# Altium PCB BMS Slave Device R1.5.PcbDoc
Units mil, origin at the board's own origin, x right, y up, seen from the top; angles counter-clockwise.
Board outline 2880 x 2235 mil, 2 copper layers (Top Layer, Bottom Layer); 91 components, 81 nets, 283 pads, 63 vias.
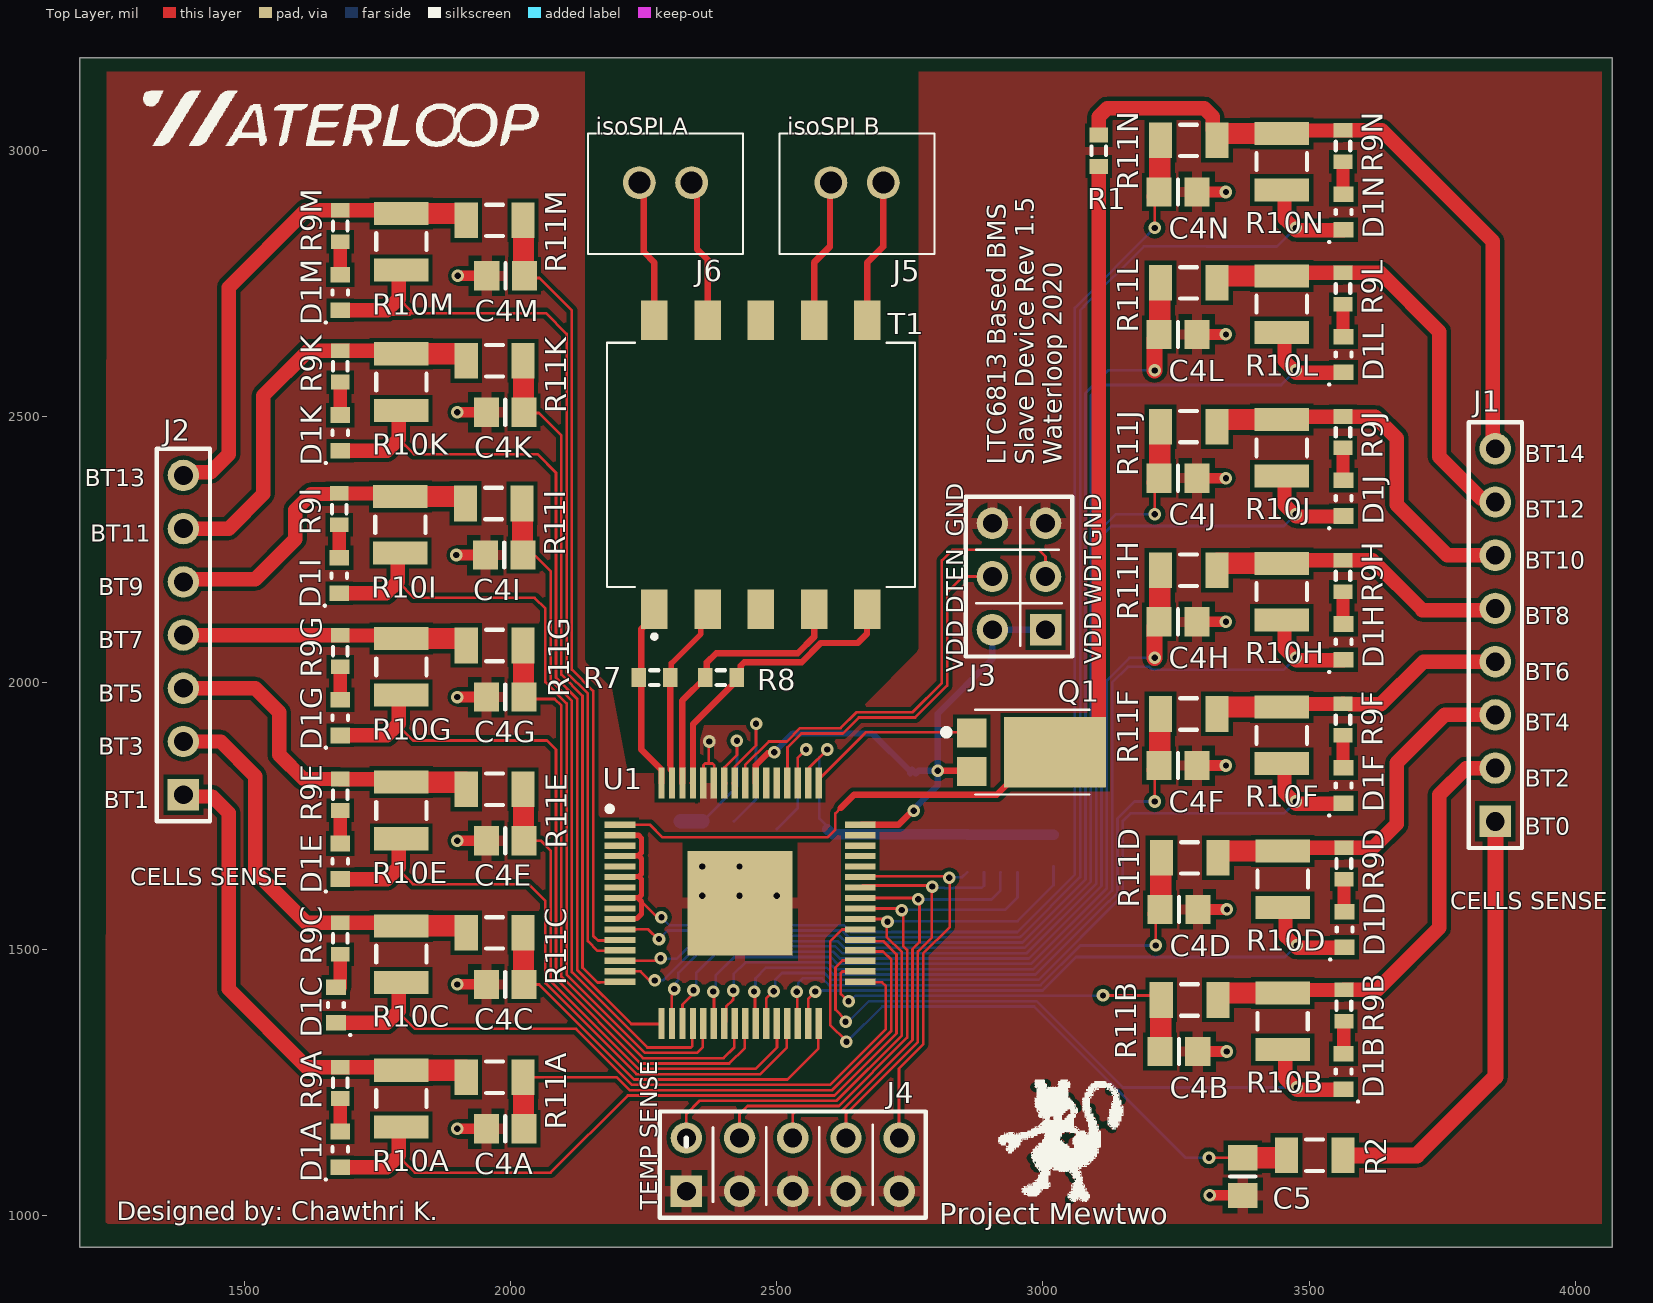
[diagram p0: Top Layer view]
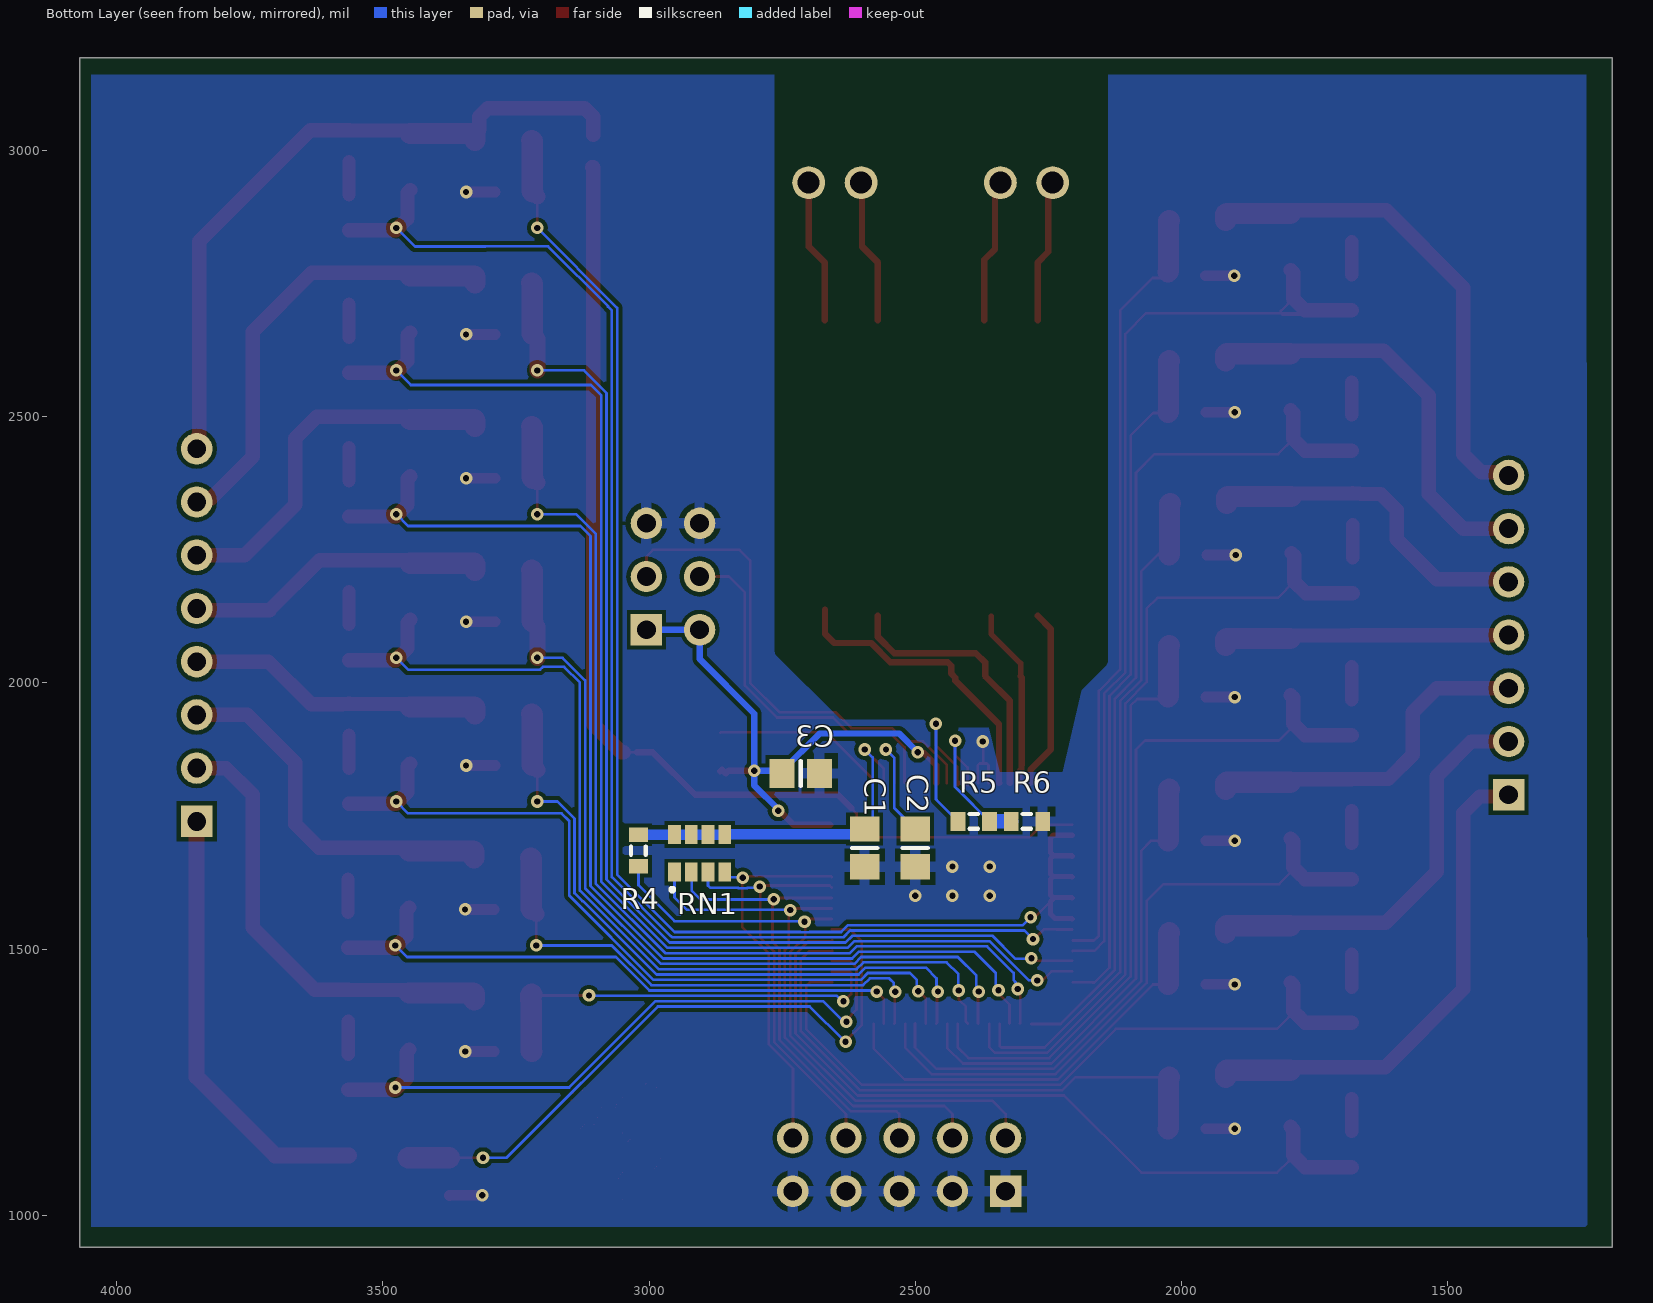
[diagram p1: Bottom Layer view, seen from below]

## Layer stack, top to bottom
Top Solder: solder mask 0.4, Solder Resist, Dk 3.5
Top Layer: signal copper 1.4
Dielectric 1: dielectric 12.6, FR-4, Dk 4.8
Bottom Layer: signal copper 1.4
Bottom Solder: solder mask 0.4, Solder Resist, Dk 3.5

## Board outline
1190,940 4070,940 4070,3175 1190,3175

## Design rules (kind name [scope] priority, off if disabled: settings)
BoardOutlineClearance [All] p1: gap=7.87 ignorepadtopadclearanceinfootprint=FALSE except(15.75: Arc-SplitBarrior Arc-SplitContinuation Track-SplitBarrior Track-SplitContinuation SMDPad-SplitBarrior SMDPad-SplitContinuation THPad-SplitBarrior THPad-SplitContinuation Via-SplitBarrior Via-SplitContinuation Fill-SplitBarrior Fill-SplitContinuation Poly-SplitBarrior Poly-SplitContinuation Region-SplitBarrior Region-SplitContinuation Text-SplitBarrior Text-SplitContinuation)
Clearance [All] p1: gap=7.87 ignorepadtopadclearanceinfootprint=FALSE except(3.5: Arc-Arc Arc-Track Arc-SMDPad Track-Track Track-SMDPad SMDPad-SMDPad; 5: Arc-Via Track-Via SMDPad-Via THPad-Via Via-Via; 10: Arc-Text Track-Text SMDPad-Text THPad-Text Via-Text Fill-Text Poly-Text Region-Text Text-Text)
HoleSize [All] p1: absolutevalues=TRUE maxlimit=248.03 minlimit=7.87 maxpercent=80.000 minpercent=20.000
MinimumAnnularRing [All] p1: minimumring=3
MinimumSolderMaskSliver [All] p1: minsoldermaskwidth=3.94
PlaneConnect [All] p1: planeconnectstyle=Relief reliefexpansion=20 reliefentries=4 reliefconductorwidth=5.1 reliefairgap=10
PolygonConnect PolygonConnect_1 [All] p1: thpad.connectstyle=Relief thpad.reliefconductorwidth=20 thpad.reliefentries=4 thpad.polygonreliefangle="90 Angle" thpad.airgapwidth=10 smdpad.connectstyle=Relief smdpad.reliefconductorwidth=20 smdpad.reliefentries=4 smdpad.polygonreliefangle="90 Angle" smdpad.airgapwidth=10 via.connectstyle=Direct via.reliefconductorwidth=20 via.reliefentries=4 via.polygonreliefangle="90 Angle" via.airgapwidth=10
RoutingCorners [All] p1: cornerstyle=Round minsetback=100 maxsetback=100
RoutingVias [All] p1: holewidth=19.68 width=39.37 viastyle="Through Hole" minholewidth=7.87 minwidth=17.72 maxholewidth=39.37 maxwidth=78.74
SilkToSilkClearance [All] p1: silktosilkclearance=3.94
SilkToSolderMaskClearance [IsPad] p1: minsilkscreentomaskgap=3.94 clearancetoexposedcopper=TRUE
SolderMaskExpansion [All] p1: expansion=4 istentingtop=FALSE
Width [All] p1: maxlimit=100 minlimit=3.5 preferedwidth=15
24 further rules are at their usual default settings.

## Classes and differential pairs
channel class "Voltage Sensing": CELL1_SENSE CELL2_SENSE CELL3_SENSE CELL4_SENSE CELL5_SENSE CELL6_SENSE CELL7_SENSE CELL8_SENSE CELL9_SENSE CELL10_SENSE CELL11_SENSE CELL12_SENSE CELL13_SENSE CELL14_SENSE
component class Designator: C1 C2 C3 Q1 R4 R5 R6 R7 R8 RN1 T1 U1
component class CELL14_SENSE: C4N D1N R9N R10N R11N
component class CELL13_SENSE: C4M D1M R9M R10M R11M
component class CELL12_SENSE: C4L D1L R9L R10L R11L
component class CELL11_SENSE: C4K D1K R9K R10K R11K
component class CELL10_SENSE: C4J D1J R9J R10J R11J
component class CELL9_SENSE: C4I D1I R9I R10I R11I
component class CELL8_SENSE: C4H D1H R9H R10H R11H
component class CELL7_SENSE: C4G D1G R9G R10G R11G
component class CELL6_SENSE: C4F D1F R9F R10F R11F
component class CELL5_SENSE: C4E D1E R9E R10E R11E
component class CELL4_SENSE: C4D D1D R9D R10D R11D
component class CELL3_SENSE: C4C D1C R9C R10C R11C
component class CELL2_SENSE: C4B D1B R9B R10B R11B
component class CELL1_SENSE: C4A D1A R9A R10A R11A
component class "BMS Slave Device R1.5": C5 J1 J2 J3 J4 R1 R2

## Components (designator, comment, footprint, x,y, rotation, side; value= is the part's Value field where it differs from the comment)
C1 "Cap" 6-0805_N 2595,1690 r90 bottom value=1uF
C2 "Cap" 6-0805_N 2500,1690 r90 bottom value=1uF
C3 "Cap" 6-0805_N 2715,1830 r0 bottom value=1uF
C4A "100V" 6-0805_N 1989.64,1162.26 r0 top (schematic designator C4)
C4B "100V" 6-0805_N 3255.49,1307.47 r180 top (schematic designator C4)
C4C "100V" 6-0805_N 1989.64,1433.56 r0 top (schematic designator C4)
C4D "100V" 6-0805_N 3255.71,1574.42 r180 top (schematic designator C4)
C4E "100V" 6-0805_N 1989.64,1703.56 r0 top (schematic designator C4)
C4F "100V" 6-0805_N 3253.86,1844.86 r180 top (schematic designator C4)
C4G "100V" 6-0805_N 1989.64,1973.56 r0 top (schematic designator C4)
C4H "100V" 6-0805_N 3253.86,2114.86 r180 top (schematic designator C4)
C4I "100V" 6-0805_N 1987.79,2240.41 r0 top (schematic designator C4)
C4J "100V" 6-0805_N 3253.86,2384.86 r180 top (schematic designator C4)
C4K "100V" 6-0805_N 1989.64,2508.56 r0 top (schematic designator C4)
C4L "100V" 6-0805_N 3253.86,2654.86 r180 top (schematic designator C4)
C4M "100V" 6-0805_N 1990.43,2765 r0 top (schematic designator C4)
C4N "100V" 6-0805_N 3253.86,2922.57 r180 top (schematic designator C4)
C5 "100V" 6-0805_N 3375.49,1072.47 r90 top
D1A "LED2" DIOC1608X06N 1679.64,1123.64 r270 top (schematic designator D1)
D1B "LED2" DIOC1608X06N 3565,1270 r270 top (schematic designator D1)
D1C "LED2" DIOC1608X06N 1671.35,1394.94 r270 top (schematic designator D1)
D1D "LED2" DIOC1608X06N 3566.85,1536.85 r270 top (schematic designator D1)
D1E "LED2" DIOC1608X06N 1679.64,1664.94 r270 top (schematic designator D1)
D1F "LED2" DIOC1608X06N 3565,1807.28 r270 top (schematic designator D1)
D1G "LED2" DIOC1608X06N 1679.64,1934.94 r270 top (schematic designator D1)
D1H "LED2" DIOC1608X06N 3565,2077.28 r270 top (schematic designator D1)
D1I "LED2" DIOC1608X06N 1677.79,2201.79 r270 top (schematic designator D1)
D1J "LED2" DIOC1608X06N 3565,2347.28 r270 top (schematic designator D1)
D1K "LED2" DIOC1608X06N 1679.64,2469.94 r270 top (schematic designator D1)
D1L "LED2" DIOC1608X06N 3565,2617.28 r270 top (schematic designator D1)
D1M "LED2" DIOC1608X06N 1679.64,2733.64 r270 top (schematic designator D1)
D1N "LED2" DIOC1608X06N 3565,2885 r270 top (schematic designator D1)
J1 "Header 8" HDR1X8 3850,1740 r90 top
J2 "ODD CELLS" HDR1X7 1385,1790 r90 top
J3 "" HDR2X3_CEN 3005,2100 r90 top
J4 "THERMISTORS" HDR2X5_CEN 2330,1045 r0 top
J5 "B2B-XH-2__LF__SN_" B2BXH2LFSN 2700,2940 r180 top
J6 "B2B-XH-2__LF__SN_" B2BXH2LFSN 2340,2940 r180 top
Q1 "DXT5551P5-13" DXT5551P513 2980,1870 r270 top
R1 "Res3" J1-0603 3105,3000 r270 top value=100
R2 "" C1206 3510.49,1112.47 r0 top value="10 1/4W"
R4 "Res3" J1-0603 3020,1685 r90 bottom value=10K
R5 "Res3" J1-0603 2390,1740 r0 bottom value=3K
R6 "Res3" J1-0603 2290,1740 r0 bottom value=1K
R7 "Res3" J1-0603 2270,2010 r180 top value=100
R8 "Res3" J1-0603 2395,2010 r0 top value=100
R9A "Res3" J1-0603 1679.64,1248.64 r270 top value=220 (schematic designator R9)
R9B "Res3" J1-0603 3565.49,1393.85 r270 top value=220 (schematic designator R9)
R9C "Res3" J1-0603 1679.64,1519.94 r270 top value=220 (schematic designator R9)
R9D "Res3" J1-0603 3565.71,1660.8 r270 top value=220 (schematic designator R9)
R9E "Res3" J1-0603 1679.64,1789.94 r270 top value=220 (schematic designator R9)
R9F "Res3" J1-0603 3563.86,1931.24 r270 top value=220 (schematic designator R9)
R9G "Res3" J1-0603 1679.64,2059.94 r270 top value=220 (schematic designator R9)
R9H "Res3" J1-0603 3563.86,2201.24 r270 top value=220 (schematic designator R9)
R9I "Res3" J1-0603 1677.79,2326.79 r270 top value=220 (schematic designator R9)
R9J "Res3" J1-0603 3563.86,2471.24 r270 top value=220 (schematic designator R9)
R9K "Res3" J1-0603 1679.64,2594.94 r270 top value=220 (schematic designator R9)
R9L "Res3" J1-0603 3563.86,2741.24 r270 top value=220 (schematic designator R9)
R9M "Res3" J1-0603 1679.64,2858.64 r270 top value=220 (schematic designator R9)
R9N "Res3" J1-0603 3563.86,3008.95 r270 top value=220 (schematic designator R9)
R10A "Res3" 14-1210 1794.64,1219.12 r270 top value="15 1/2W" (schematic designator R10)
R10B "Res3" 14-1210 3450.49,1364.32 r270 top value="15 1/2W" (schematic designator R10)
R10C "Res3" 14-1210 1794.64,1490.41 r270 top value="15 1/2W" (schematic designator R10)
R10D "Res3" 14-1210 3450.71,1631.28 r270 top value="15 1/2W" (schematic designator R10)
R10E "Res3" 14-1210 1794.64,1760.41 r270 top value="15 1/2W" (schematic designator R10)
R10F "Res3" 14-1210 3448.86,1901.71 r270 top value="15 1/2W" (schematic designator R10)
R10G "Res3" 14-1210 1794.64,2030.41 r270 top value="15 1/2W" (schematic designator R10)
R10H "Res3" 14-1210 3448.86,2171.71 r270 top value="15 1/2W" (schematic designator R10)
R10I "Res3" 14-1210 1792.79,2297.26 r270 top value="15 1/2W" (schematic designator R10)
R10J "Res3" 14-1210 3448.86,2441.71 r270 top value="15 1/2W" (schematic designator R10)
R10K "Res3" 14-1210 1794.64,2565.41 r270 top value="15 1/2W" (schematic designator R10)
R10L "Res3" 14-1210 3448.86,2711.71 r270 top value="15 1/2W" (schematic designator R10)
R10M "Res3" 14-1210 1794.64,2829.12 r270 top value="15 1/2W" (schematic designator R10)
R10N "Res3" 14-1210 3448.86,2979.42 r270 top value="15 1/2W" (schematic designator R10)
R11A "" C1206 1969.64,1259.12 r180 top value="10 1/4W" (schematic designator R11)
R11B "" C1206 3275.49,1404.32 r0 top value="10 1/4W" (schematic designator R11)
R11C "" C1206 1969.64,1530.41 r180 top value="10 1/4W" (schematic designator R11)
R11D "" C1206 3275.71,1671.28 r0 top value="10 1/4W" (schematic designator R11)
R11E "" C1206 1969.64,1800.41 r180 top value="10 1/4W" (schematic designator R11)
R11F "" C1206 3273.86,1941.71 r0 top value="10 1/4W" (schematic designator R11)
R11G "" C1206 1969.64,2070.41 r180 top value="10 1/4W" (schematic designator R11)
R11H "" C1206 3273.86,2211.71 r0 top value="10 1/4W" (schematic designator R11)
R11I "" C1206 1967.79,2337.26 r180 top value="10 1/4W" (schematic designator R11)
R11J "" C1206 3273.86,2481.71 r0 top value="10 1/4W" (schematic designator R11)
R11K "" C1206 1969.64,2605.41 r180 top value="10 1/4W" (schematic designator R11)
R11L "" C1206 3273.86,2751.71 r0 top value="10 1/4W" (schematic designator R11)
R11M "" C1206 1969.64,2869.12 r180 top value="10 1/4W" (schematic designator R11)
R11N "" C1206 3273.86,3019.42 r0 top value="10 1/4W" (schematic designator R11)
RN1 "Res Array" YC164 2905,1680 r90 bottom value=10K
T1 "HM2100NLT" HM2100NLT 2470,2410 r0 top
U1 "LTC6813ILWE-1#3ZZPBF" QFP50P1200X1200X120-65N 2430.91,1586.1 r0 top

## Footprints (in the part's own frame and the unit in brackets; to place one, negate y for a bottom-side part, rotate by r counter-clockwise, add the part's x,y. Pads: shape width x height; smd on the part's side, far side on the other; paste and mask are expansions set on the pad)
6-0805_N [mm] "Chip Resistor, Body 2.0x1.2mm, IPC Medium Density"
  rect 1.2x1.4 smd: 1(-0.9,0) 2(0.9,0)
  silkscreen extent 0,-0.6 0,0.6, body extent -1.07,-0.7 1.07,0.7, height 0.7
14-1210 [mm] "Chip Resistor, Body 3.2x2.5mm, IPC High Density"
  rect 1.1x2.6 smd: 1(-1.35,0) 2(1.35,0)
  silkscreen extent -0.4,-1.2 0.4,1.2, body extent -1.68,-1.32 1.68,1.32, height 0.9
B2BXH2LFSN [mm]
  round 1.575 hole 1.05: 1(0,0) 2(2.5,0)
  silkscreen extent -2.45,-2.35 4.95,3.4
C1206 [mm] "Chip Capacitor, Body 3.2x1.6mm, IPC High Density"
  rect 1.1x1.7 smd: 1(-1.35,0) 2(1.35,0)
  silkscreen extent -0.4,-0.75 0.4,0.75, body extent -1.7,-0.9 1.7,0.9, height 1.3
DIOC1608X06N [mm] "Chip Diode, 2-Leads, Body 1.60x0.80mm, IPC Medium Density"
  rect 0.75x0.95 smd: 1(-0.85,0) 2(0.85,0)
  silkscreen extent -0.1,-0.74 1.49,0.38, body extent -0.8,-0.4 0.8,0.4, height 0.6
DXT5551P513 [mm]
  rect 1.39x1.4 smd: 1(-0.92,-2.89) 2(0.92,-2.89)
  rect 3.36x4.86 smd: 3(0,1.092)
  silkscreen extent -2.02,-4.25 2.02,2.73
HDR1X7 [mm] "Connector; Header; 7 Position"
  rect 1.5x1.5 hole 0.9: 1(0,0)
  round 1.5 hole 0.9: 2(2.54,0) 3(5.08,0) 4(7.62,0) 5(10.16,0) 6(12.7,0) 7(15.24,0)
  silkscreen extent -1.27,-1.27 16.51,1.27
HDR1X8 [mm] "Connector; Header; 8 Position"
  rect 1.5x1.5 hole 0.9: 1(0,0)
  round 1.5 hole 0.9: 2(2.54,0) 3(5.08,0) 4(7.62,0) 5(10.16,0) 6(12.7,0) 7(15.24,0) 8(17.78,0)
  silkscreen extent -1.27,-1.27 19.05,1.27
HDR2X3_CEN [mm] "Connector; Header; 3x2 Position"
  rect 1.5x1.5 hole 0.9: 1(0,0)
  round 1.5 hole 0.9: 2(2.54,0) 3(5.08,0) 4(0,2.54) 5(2.54,2.54) 6(5.08,2.54)
  silkscreen extent -1.27,-1.27 6.35,3.81
HDR2X5_CEN [mm] "Connector; Header; 5x2 Position"
  rect 1.5x1.5 hole 0.9: 1(0,0)
  round 1.5 hole 0.9: 2(2.54,0) 3(5.08,0) 4(7.62,0) 5(10.16,0) 6(0,2.54) 7(2.54,2.54) 8(5.08,2.54) 9(7.62,2.54) 10(10.16,2.54)
  silkscreen extent -1.27,-1.27 11.43,3.81
HM2100NLT [mm]
  rect 1.27x1.89 smd: 1(-5.08,-6.895) 2(-2.54,-6.895) 3(0,-6.895) 4(2.54,-6.895) 5(5.08,-6.895) 6(5.08,6.895) 7(2.54,6.895) 8(0,6.895) 9(-2.54,6.895) 10(-5.08,6.895)
  silkscreen extent -7.35,-8.3 7.35,5.82
J1-0603 [mm] "Chip Resistor, Body 1.6x0.8mm, IPC High Density"
  rect 0.7x0.9 smd: 1(-0.75,0) 2(0.75,0)
  silkscreen extent -0.2,-0.35 0.2,0.35, body extent -0.85,-0.48 0.85,0.48, height 0.9
QFP50P1200X1200X120-65N [mm]
  rect 1.475x0.3 smd: 1(-5.738,3.75) 2(-5.738,3.25) 3(-5.738,2.75) 4(-5.738,2.25) 5(-5.738,1.75) 6(-5.738,1.25) 7(-5.738,0.75) 8(-5.738,0.25) 9(-5.738,-0.25) 10(-5.738,-0.75) 11(-5.738,-1.25) 12(-5.738,-1.75) 13(-5.738,-2.25) 14(-5.738,-2.75) 15(-5.738,-3.25) 16(-5.738,-3.75) 33(5.738,-3.75) 34(5.738,-3.25) 35(5.738,-2.75) 36(5.738,-2.25) 37(5.738,-1.75) 38(5.738,-1.25) 39(5.738,-0.75) 40(5.738,-0.25) 41(5.738,0.25) 42(5.738,0.75) 43(5.738,1.25) 44(5.738,1.75) 45(5.738,2.25) 46(5.738,2.75) 47(5.738,3.25) 48(5.738,3.75)
  rect 0.3x1.475 smd: 17(-3.75,-5.738) 18(-3.25,-5.738) 19(-2.75,-5.738) 20(-2.25,-5.738) 21(-1.75,-5.738) 22(-1.25,-5.738) 23(-0.75,-5.738) 24(-0.25,-5.738) 25(0.25,-5.738) 26(0.75,-5.738) 27(1.25,-5.738) 28(1.75,-5.738) 29(2.25,-5.738) 30(2.75,-5.738) 31(3.25,-5.738) 32(3.75,-5.738) 49(3.75,5.738) 50(3.25,5.738) 51(2.75,5.738) 52(2.25,5.738) 53(1.75,5.738) 54(1.25,5.738) 55(0.75,5.738) 56(0.25,5.738) 57(-0.25,5.738) 58(-0.75,5.738) 59(-1.25,5.738) 60(-1.75,5.738) 61(-2.25,5.738) 62(-2.75,5.738) 63(-3.25,5.738) 64(-3.75,5.738)
  rect 5x5 smd: 65(0,0)
  silkscreen extent -6.35,4.38 -6.1,4.62, body extent -6,-6 6,6, height 1.2
YC164 [mm]
  rect 0.9x0.6 smd: 1(-0.9,1.2) 2(-0.9,0.4) 3(-0.9,-0.4) 4(-0.9,-1.2) 5(0.9,-1.2) 6(0.9,-0.4) 7(0.9,0.4) 8(0.9,1.2)
  silkscreen extent -1.79,1.25 -1.68,1.36

## Part data
C1 C2 C3: "Capacitor", LatestRevisionDate=17-Jul-2002, LatestRevisionNote="Re-released for DXP Platform.", PackageDescription="Radial Cap, Thru-Hole; 2 Leads; 0.3 in Pin Spacing", PackageReference=RAD-0.3, Published=8-Jun-2000, Publisher="Altium Limited"
C4A C4B C4C C4D C4E C4F C4G C4H C4I C4J C4K C4L C4M C4N C5: library part Cap, "Capacitor", 100V="10 nF", LatestRevisionDate=17-Jul-2002, LatestRevisionNote="Re-released for DXP Platform.", PackageDescription="Radial Cap, Thru-Hole; 2 Leads; 0.3 in Pin Spacing", PackageReference=RAD-0.3, Published=8-Jun-2000, Publisher="Altium Limited"
D1A D1B D1C D1D D1E D1F D1G D1H D1I D1J D1K D1L D1M D1N: "Green LED", LatestRevisionDate=17-Jul-2002, LatestRevisionNote="Re-released for DXP Platform.", PackageDescription="SM LED; 2 Flat Leads", PackageReference=3.2X1.6X1.1, PackageVersion=Feb-2002, Published=8-Jun-2000, Publisher="Altium Limited"
J1: "Header, 8-Pin", LatestRevisionDate=17-Jul-2002, LatestRevisionNote="Re-released for DXP Platform.", Publisher="Altium Limited"
J2: library part "Header 7", LatestRevisionDate=17-Jul-2002, LatestRevisionNote="Re-released for DXP Platform.", Publisher="Altium Limited"
J3: library part "Header 3X2A", "Header, 3-Pin, Dual row", LatestRevisionDate=17-Jul-2002, LatestRevisionNote="Re-released for DXP Platform.", Publisher="Altium Limited"
J4: library part "Header 5X2A", "Header, 5-Pin, Dual row", LatestRevisionDate=17-Jul-2002, LatestRevisionNote="Re-released for DXP Platform.", Publisher="Altium Limited"
J5 J6: "Connector", Manufacturer_Name="JST (JAPAN SOLDERLESS TERMINALS)", Manufacturer_Part_Number="B2B-XH-2 (LF)(SN)", RS Part Number=1755499, Datasheet Link=http://uk.rs-online.com/web/p/products/1755297, Height=7mm, RS Price/Stock=http://uk.rs-online.com/web/p/products/1755499
Q1: "Transistor BJT NPN", Manufacturer_Name="Diodes Inc.", Mouser Part Number=522-DXT5551P5-13, Datasheet Link=https://www.diodes.com/assets/Datasheets/DXT5551P5.pdf, Manufacturer_Part_Number=DXT5551P5-13, Mouser Price/Stock=https://www.mouser.com/Search/Refine.aspx?Keyword=522-DXT5551P5-13
R1 R4 R5 R6 R7 R8 R9A R9B R9C R9D R9E R9F R9G R9H R9I R9J R9K R9L R9M R9N R10A R10B R10C R10D R10E R10F R10G R10H R10I R10J R10K R10L R10M R10N: "Resistor", LatestRevisionDate=29-May-2009, LatestRevisionNote="IPC-7351 Footprint Added.", PackageDescription="Chip Resistor", PackageReference=J1-0603, Published=8-Jun-2000, Publisher="Altium Limited"
R2 R11A R11B R11C R11D R11E R11F R11G R11H R11I R11J R11K R11L R11M R11N: library part Res3, "Resistor", LatestRevisionDate=29-May-2009, LatestRevisionNote="IPC-7351 Footprint Added.", PackageDescription="Chip Resistor", PackageReference=J1-0603, Published=8-Jun-2000, Publisher="Altium Limited"
RN1: "Isolated Resistor Network", Code_IPC=SOIC127P600-16, Code_JEDEC=MS-012-AC, LatestRevisionDate=29-May-2009, LatestRevisionNote="IPC-7351 Footprint Added.", PackageDescription="16-Pin Small Outline Integrated Circuit 1.27 mm Pitch", PackageReference=SO-16, Published=24-Mar-1999, Publisher="Altium Limited"
T1: "Transformer", Manufacturer_Name=Pulse, Mouser Part Number=673-HM2100NLT, Datasheet Link=https://productfinder.pulseeng.com/doc_type/WEB301/doc_num/HM2100NL/doc_part/HM2100NL.pdf, Height=3.45mm, Manufacturer_Part_Number=HM2100NLT, Mouser Price/Stock=https://www.mouser.com/Search/Refine.aspx?Keyword=673-HM2100NLT
U1: "Integrated Circuit", Manufacturer_Name="Analog Devices", Mouser Part Number=584-6813ILWE13ZZPBF, Datasheet Link=https://www.analog.com/media/en/technical-documentation/data-sheets/68131f.pdf, Height=1.6mm, Manufacturer_Part_Number=LTC6813ILWE-1#3ZZPBF

## Via types
v1: diameter 23.62/23.62 (per signal layer), hole 11.81, Top Layer to Bottom Layer, 62 vias
v2: diameter 23.62, hole 11.81, Top Layer to Bottom Layer, 1 vias

## Nets (pads, with @x,y where several pads share a name; then routed paths per layer and width w, separated by ;. In a path a pad name is that pad's centre, name@x,y a point inside that pad or via, vN(x,y) a via of type N, cw(c..) or ccw(c..) an arc to the next point about the centre after c; other vN are vias at no path point)
+5: C3.2 J3.1 J3.4 Q1.2 U1.48 U1.55 | length 1120.3
  Top Layer w12: U1.55 2460.53,1812.1 2460.53,1845.53 2482.78,1867.78 2492.78,1867.78 v1(2495,1870) ; U1.48@2659.49,1733.54 2728.54,1733.54 2755,1760 v2(2757.5,1760) ; v1(2802.38,1835.28) 2850.8,1835.28 2856.07,1830 2863.04,1836.96 Q1.2
  Bottom Layer w12: v1(2495,1870) 2530,1905 2679.37,1905 2750.43,1833.94 C3.2@2750.43,1833.34 ; C3.2 C3.2@2750.43,1833.34 ; v2(2757.5,1760) 2757.5,1762.5 2802.38,1807.38 v1(2802.38,1835.28) ; J3.1 J3.4 2905,2045 2802.38,1942.38 v1(2802.38,1835.28) ; C3.2@2750.43,1833.34 2754.06,1836.96 2761.02,1830 2766.29,1835.28 v1(2802.38,1835.28)
DISCHARGE_EN: J3.5 U1.52 | length 689.2
  Top Layer w5: U1.52@2515.91,1811.1 U1.52@2517.32,1812.52 ; U1.52@2520,1812.32 2520,1879.04 2545.96,1905 2624.14,1905 2654.14,1935 2760,1935 2820,1995 2820,2170 2850,2200 J3.5
GND: C1.1 C2.1 C3.1 C4A.1 C4B.1 C4C.1 C4D.1 C4E.1 C4F.1 C4G.1 C4H.1 C4I.1 C4J.1 C4K.1 C4L.1 C4M.1 C4N.1 C5.1 J3.3 J3.6 J4.1 J4.2 J4.3 J4.4 J4.5 R6.1 U1.59 U1.60 U1.65 | length 958.1
  Top Layer w5: U1.60 2362.2,1812.2 2362.2,1845.61 2365.24,1848.66 2372.25,1848.66 ; v1(2373.31,1890) 2372.25,1888.95 2372.25,1848.66 ; U1.59 2382.31,1812.62 2382.31,1845.61 2379.26,1848.66 2372.25,1848.66
  Top Layer w20: v1(1897.79,2240.41) C4I.1 ; v1(1899.64,1162.26) C4A.1 ; v1(1899.64,1433.56) C4C.1 ; v1(1899.64,1703.56) C4E.1 ; v1(1899.64,1973.56) C4G.1 ; v1(1899.64,2508.56) C4K.1 ; v1(1900.43,2765) C4M.1 ; C4F.1 v1(3343.86,1844.86) ; C4H.1 v1(3343.86,2114.86) ; C4J.1 v1(3343.86,2384.86) ; C4L.1 v1(3343.86,2654.86) ; C4N.1 v1(3343.86,2922.57) ; C4B.1 v1(3345.49,1307.47) ; C4D.1 v1(3345.71,1574.42) ; v1(3313.44,1037.53) 3313.69,1037.28 3375.24,1037.28 C5.1
  other v1: 2360,1600 2430,1600 2500,1600 2360,1655 2430,1655
NetC1_2: C1.2 R4.2 RN1.5 RN1.6 RN1.7 RN1.8 U1.50 | length 669.5
  Top Layer w5.1: U1.50 2558.86,1838.86 v1(2595,1875)
  Bottom Layer w5.1: C1.2 2595,1730 2580,1745 2580,1860 v1(2595,1875)
  Bottom Layer w20: C1.2 2605,1715.43 RN1.5 2858.21,1714.98 2889.25,1714.98 2920.75,1714.98 2952.24,1714.98 3019.55,1714.98 R4.2
NetC2_2: C2.2 U1.51 | length 241.9
  Top Layer w5.1: U1.51 2539.17,1859.17 v1(2555,1875)
  Bottom Layer w5.1: C2.2 2539.17,1764.61 2539.17,1859.17 v1(2555,1875)
NetC4A_2: C4A.2 R11A.1 U1.36 | length 1045.9
  Top Layer w5: R11A.1 2199.46,1259.12 2223.58,1235 2604.14,1235 2715,1345.86 2715,1480 2699.51,1495.49 2656.83,1495.49 U1.36@2655.91,1496.42
  Top Layer w40: R11A.1 2023.93,1257.97 2023.93,1163.41 C4A.2
NetC4B_2: C4B.2 R11B.1 U1.34 | length 798.6
  Top Layer w5: v1(2634.87,1401.87) 2633.86,1401.87 2632.32,1403.41 2620.28,1415.46 2620.28,1454.89 2623.2,1457.82 2656.48,1457.82 U1.34 ; v1(3112.91,1412.91) 3113.11,1412.71 3213.95,1412.71 R11B.1
  Top Layer w40: C4B.2 3221.2,1308.62 R11B.1@3221.2,1400.51 ; R11B.1@3220.68,1415 3222.34,1413.35 R11B.1
  Bottom Layer w5: v1@2635,1400 2647.21,1412.21 3112.21,1412.21 v1(3112.91,1412.91)
NetC4C_2: C4C.2 R11C.1 U1.32 | length 794.9
  Top Layer w5: C4C.2 2053.3,1433.56 2231.86,1255 2520,1255 2577.93,1312.93 2577.93,1358.8 U1.32@2577.64,1359.09
  Top Layer w40: R11C.1 2023.93,1529.27 2023.93,1434.71 C4C.2
NetC4D_2: C4D.2 R11D.1 U1.30 | length 957
  Top Layer w5: v1(2537.61,1419.62) 2537.9,1419.62 2538.25,1419.27 2538.25,1361.12 U1.30 ; v1(3211.85,1506.85) C4D.2@3211.85,1566
  Top Layer w30: C4D.2@3211.85,1566 C4D.2
  Top Layer w40: C4D.2 3221.42,1575.57 3221.42,1670.13 R11D.1
  Bottom Layer w5: v1@2540,1420 2540.14,1420.14 2540.14,1436.38 2548.76,1445 2585,1445 2597.79,1432.21 2995.5,1432.21 3070.13,1506.85 v1(3211.85,1506.85)
NetC4E_2: C4E.2 R11E.1 U1.28 | length 955.7
  Top Layer w5: C4E.2 2056.44,1703.56 2075,1685 2075,1440.15 2240.15,1275 2460,1275 2500.2,1315.2 2500.2,1359.8 U1.28
  Top Layer w40: R11E.1 2023.93,1799.27 2023.93,1704.71 C4E.2
NetC4F_2: C4F.2 R11F.1 U1.26 | length 1235.4
  Top Layer w5: v1(2457.32,1420.2) 2458.88,1418.64 2458.88,1361.75 U1.26 ; v1(3210,1777.28) C4F.2@3210,1836.43
  Top Layer w30: C4F.2@3210,1836.43 C4F.2
  Top Layer w40: C4F.2 3219.57,1846 3219.57,1940.57 R11F.1
  Bottom Layer w5: v1@2460,1420 2460,1445 2480,1465 2593.28,1465 2606.07,1452.21 2986.21,1452.21 3123.99,1590 3125,1590 3140,1605 3140,1745 3172.28,1777.28 v1(3210,1777.28)
NetC4G_2: C4G.2 R11G.1 U1.24 | length 1124.5
  Top Layer w5: C4G.2 2028.64,1970 2082.57,1970 2095,1957.57 2095,1448.43 2248.43,1295 2400,1295 2420,1315 2420,1358.94 U1.24@2420.16,1359.09
  Top Layer w40: R11G.1 2023.93,2069.27 2023.93,1974.71 C4G.2
NetC4H_2: C4H.2 R11H.1 U1.22 | length 1572.5
  Top Layer w5: v1(2380.55,1420.08) 2380.72,1420.08 2381.27,1420.62 2382.01,1419.88 2382.01,1360.51 U1.22
  Top Layer w30: v1(3210,2047.28) 3210,2106.43 C4H.2
  Top Layer w40: C4H.2 3219.57,2116 3219.57,2210.57 R11H.1
  Bottom Layer w5: v1@2385,1420 2385,1450 2420,1485 2601.57,1485 2614.35,1472.21 2977.92,1472.21 3120,1614.29 3120,2005 3162.28,2047.28 v1(3210,2047.28)
NetC4I_2: C4I.2 R11I.1 U1.20 | length 1242.4
  Top Layer w5: C4I.2@2041.55,2243.45 2075,2210 2075,2005.86 2115,1965.86 2115,1456.72 2256.72,1315 2338.49,1315 2341.42,1317.93 U1.20@2341.42,1359.09
  Top Layer w40: R11I.1 2022.08,2336.12 2022.08,2241.56 C4I.2
NetC4J_2: C4J.2 R11J.1 U1.18 | length 1921.5
  Top Layer w5: U1.18 2302.54,1360.61 2302.54,1413.15 2312.28,1422.89 2310.22,1424.95 v1(2307.26,1424.95) ; v1(3210,2317.28) C4J.2@3210,2376.43
  Top Layer w30: C4J.2@3210,2376.43 C4J.2
  Top Layer w40: C4J.2 3219.57,2386 3219.57,2480.57 R11J.1
  Bottom Layer w5: v1@2305.1,1427.12 2311.11,1433.13 2311.11,1437.62 2314.96,1441.47 2314.96,1454.96 2365,1505 2609.85,1505 2622.64,1492.21 2969.64,1492.21 3100,1622.57 3100,2280 3137.28,2317.28 v1(3210,2317.28)
NetC4K_2: C4K.2 R11K.1 U1.16 | length 1285.5
  Top Layer w5: C4K.2@2023.93,2511.59 2028.39,2507.13 2052.87,2507.13 2095,2465 2095,2015.86 2135,1975.86 2135,1465 2162.93,1437.07 2167.27,1437.07 2167.56,1437.36 U1.16@2204.09,1437.36
  Top Layer w40: R11K.1 2023.93,2604.27 2023.93,2509.71 C4K.2
NetC4L_2: C4L.2 R11L.1 U1.14 | length 2186.4
  Top Layer w5: U1.14 2284.17,1477.83 2281.57,1480.44 v1(2281.57,1482.55)
  Top Layer w30: v1(3210,2587.28) 3210,2646.43 C4L.2
  Top Layer w40: C4L.2 3219.57,2656 3219.57,2750.57 R11L.1
  Bottom Layer w5: v1(2281.57,1482.55) 2282.11,1482.01 2312.01,1482.01 2355,1525 2618.14,1525 2630.92,1512.21 2961.36,1512.21 3080,1630.86 3080,2545 3122.28,2587.28 v1(3210,2587.28)
NetC4M_2: C4M.2 R11M.1 U1.12 | length 1458.2
  Top Layer w5: C4M.2 2029.92,2760.94 2054.06,2760.94 2115,2700 2115,2025 2155,1985 2155,1525 2163.9,1516.1 U1.12@2204.09,1516.1
  Top Layer w40: R11M.1 2023.93,2867.97 2023.93,2773.41 C4M.2@2025.08,2772.26
NetC4N_2: C4N.2 R11N.1 U1.2 U1.4 U1.6 U1.8 U1.10 | length 2681.6
  Top Layer w5: 2245.91,1589.18 2278.64,1556.45 2281.82,1559.63 v1(2283.19,1559.63) ; v1(3210,2855) C4N.2@3210,2914.15
  Top Layer w10: U1.10 2205.91,1557.48 2237.28,1557.48 2245.91,1566.1 2245.91,1589.18 2240.05,1595.04 ; U1.8 2205.91,1596.85 2240.95,1596.85 2245.91,1601.8 2245.91,1631.27 2240.95,1636.22 ; U1.6 2205.91,1636.22 2240.95,1636.22 ; U1.4 2205.91,1675.59 2240.39,1675.59 ; U1.2 2240.05,1714.06 2245.91,1708.2 2245.91,1681.1 2240.39,1675.59 ; 2240.39,1675.59 2245.91,1670.08 2245.91,1641.17 2240.95,1636.22
  Top Layer w30: C4N.2@3210,2914.15 C4N.2
  Top Layer w40: C4N.2 3219.57,2923.72 3219.57,3018.28 R11N.1
  Bottom Layer w5: v1(2283.19,1559.63) 2297.82,1545 2626.42,1545 2639.21,1532.21 2698.06,1532.21 2698.81,1531.46 2714.81,1531.46 2715.39,1532.05 2715.98,1532.05 2716.14,1532.21 2952.21,1532.21 3060,1640 3060,2705 v1(3210,2855)
NetC5_2: C5.2 R2.1 U1.38 | length 1240.9
  Top Layer w5: v1(2630.81,1325.72) 2630.81,1326.88 2600.28,1357.42 2600.28,1514.29 2622.87,1536.89 U1.38 ; v1@3310,1110 v1(3312.09,1107.91) C5.2
  Top Layer w27: R2.1@3452.77,1107.91 R2.1
  Top Layer w40: C5.2 R2.1@3452.77,1107.91
  Bottom Layer w5: v1@2633.11,1327.06 2698.26,1392.21 2983.64,1392.21 3267.95,1107.91 v1(3312.09,1107.91)
NetD1A_1: D1A.1 R9A.2 | length 62
  Top Layer w25: D1A.1 R9A.2
NetD1A_2: D1A.2 R10A.2 U1.37 | length 1466.7
  Top Layer w5: 1778.6,1101.22 1789.64,1101.22 1798.78,1101.22 1820,1080 2075,1080 2220,1225 2608.28,1225 2725,1341.72 2725,1490 2700,1515 2657.01,1515 U1.37@2655.91,1516.1
  Top Layer w27: D1A.2 1767.56,1090.18 1778.6,1101.22 1789.64,1112.26 1789.64,1160.97 R10A.2
NetD1B_1: D1B.1 R9B.2 | length 62
  Top Layer w25: D1B.1@3565.49,1302.32 R9B.2
NetD1B_2: D1B.2 R10B.2 U1.35 | length 1261.6
  Top Layer w5: v1(2629.25,1363.48) 2629.25,1367.15 2610.28,1386.12 2610.28,1465.44 2623.2,1478.37 2656.27,1478.37 U1.35
  Top Layer w27: R10B.2 3455.49,1306.17 3455.49,1257.47 3477.57,1235.39 D1B.2@3565.49,1235.39
  Bottom Layer w5: v1@2635,1363.88 2673.34,1402.21 2987.79,1402.21 3150.1,1239.9 v1(3476.62,1239.9)
NetD1C_1: D1C.1 R9C.2 | length 62
  Top Layer w25: D1C.1@1679.64,1428.41 R9C.2
NetD1C_2: D1C.2 R10C.2 U1.33 | length 1329.9
  Top Layer w5: 1778.6,1372.52 1789.64,1372.52 1797.48,1372.52 1820,1350 2122.72,1350 2227.72,1245 2600,1245 2705,1350 2705,1430.2 2697.84,1437.36 U1.33@2655.91,1437.36
  Top Layer w27: D1C.2@1679.64,1361.48 1767.56,1361.48 1778.6,1372.52 1788.04,1381.96 1789.64,1383.56 1789.64,1432.26 R10C.2
NetD1D_1: D1D.1 R9D.2 | length 62
  Top Layer w25: D1D.1@3565.71,1569.27 R9D.2
NetD1D_2: D1D.2 R10D.2 U1.31 | length 1179.7
  Top Layer w5: U1.31 2558.86,1406.35 2572.32,1419.82 v1(2572.32,1420.2)
  Top Layer w27: R10D.2 3455.71,1573.13 3455.71,1524.42 3477.8,1502.34 D1D.2@3565.71,1502.34
  Bottom Layer w5: v1@2575,1420 2575,1422 2575.46,1422.46 2575.7,1422.21 2999.64,1422.21 3062.43,1485 3455,1485 v1(3476.85,1506.85)
NetD1E_1: D1E.1 R9E.2 | length 62
  Top Layer w25: D1E.1 R9E.2
NetD1E_2: D1E.2 R10E.2 U1.29 | length 1226.6
  Top Layer w5: 1778.6,1642.52 1795.82,1642.52 1816.37,1621.97 2033.03,1621.97 2065,1590 2065,1436.01 2236.01,1265 2469.14,1265 2518.58,1314.44 U1.29@2518.58,1359.09
  Top Layer w27: D1E.2 1767.56,1631.48 1778.6,1642.52 1789.64,1653.56 1789.64,1702.26 R10E.2
NetD1F_1: D1F.1 R9F.2 | length 62
  Top Layer w25: D1F.1@3563.86,1839.7 R9F.2
NetD1F_2: D1F.2 R10F.2 U1.27 | length 1472.3
  Top Layer w5: U1.27 2480.12,1406.8 v1(2494.23,1420.91)
  Top Layer w27: R10F.2 3453.86,1843.56 3453.86,1794.86 3475.95,1772.77 D1F.2@3563.86,1772.77
  Bottom Layer w5: v1@2496.91,1420.71 2496.91,1441.91 2510,1455 2589.14,1455 2601.93,1442.21 2991.36,1442.21 3150,1600.86 3150,1740.86 3164.14,1755 3452.72,1755 v1(3475,1777.28)
NetD1G_1: D1G.1 R9G.2 | length 62
  Top Layer w25: D1G.1 R9G.2
NetD1G_2: D1G.2 R10G.2 U1.25 | length 1405.2
  Top Layer w5: 1778.6,1912.52 1795.82,1912.52 1816.37,1891.97 2068.03,1891.97 2085,1875 2085,1444.29 2244.29,1285 2410.34,1285 2439.84,1314.5 U1.25@2439.84,1359.09
  Top Layer w27: D1G.2 1767.56,1901.48 1778.6,1912.52 1789.64,1923.56 1789.64,1972.26 R10G.2
NetD1H_1: D1H.1 R9H.2 | length 62
  Top Layer w25: D1H.1@3563.86,2109.7 R9H.2
NetD1H_2: D1H.2 R10H.2 U1.23 | length 1822.1
  Top Layer w5: U1.23 2404.78,1363.6 2404.78,1392.05 2416.36,1403.62 2418.2,1405.46 v1(2418.2,1422.12)
  Top Layer w27: R10H.2 3453.86,2113.56 3453.86,2064.86 3475.95,2042.77 D1H.2@3563.86,2042.77
  Bottom Layer w5: v1@2419.04,1420.71 2419.04,1452.91 2441.13,1475 2597.43,1475 2610.21,1462.21 2982.07,1462.21 3130,1610.15 3130,2000.86 3159.57,2030.43 3199.54,2030.43 3204.97,2025 3452.72,2025 v1(3475,2047.28)
NetD1I_1: D1I.1 R9I.2 | length 62
  Top Layer w25: D1I.1 R9I.2
NetD1I_2: D1I.2 R10I.2 U1.21 | length 1541.8
  Top Layer w5: 1787.79,2190.41 1818.21,2160 2045,2160 2065,2140 2065,2001.72 2105,1961.72 2105,1452.57 2252.57,1305 2350,1305 2361.1,1316.1 U1.21@2361.1,1359.09
  Top Layer w27: D1I.2 1765.71,2168.33 1787.79,2190.41 1787.79,2239.12 R10I.2
NetD1J_1: D1J.1 R9J.2 | length 62
  Top Layer w25: D1J.1@3563.86,2379.7 R9J.2
NetD1J_2: D1J.2 R10J.2 U1.19 | length 2161
  Top Layer w5: U1.19 2322.64,1395.75 2345.91,1419.01 2343.5,1421.42 v1(2343.5,1422.52)
  Top Layer w27: R10J.2 3453.86,2383.56 3453.86,2334.86 3475.95,2312.77 D1J.2@3563.86,2312.77
  Bottom Layer w5: v1@2348.58,1420.91 2348.58,1454.55 2389.03,1495 2605.71,1495 2618.5,1482.21 2973.78,1482.21 3110,1618.43 3110,2275.86 3129.14,2295 3452.72,2295 v1(3475,2317.28)
NetD1K_1: D1K.1 R9K.2 | length 62
  Top Layer w25: D1K.1 R9K.2
NetD1K_2: D1K.2 R10K.2 U1.17 | length 1646.8
  Top Layer w5: 1789.64,2458.56 1818.21,2430 2050,2430 2085,2395 2085,2010 2125,1970 2125,1460.86 2226.76,1359.09 U1.17@2282.36,1359.09
  Top Layer w27: D1K.2 1767.56,2436.48 1789.64,2458.56 1789.64,2507.26 R10K.2
NetD1L_1: D1L.1 R9L.2 | length 62
  Top Layer w25: D1L.1@3563.86,2649.7 R9L.2
NetD1L_2: D1L.2 R10L.2 U1.15 | length 2472.8
  Top Layer w5: U1.15 2243.86,1458.15 2260.91,1441.1 v1(2270.91,1441.1)
  Top Layer w27: R10L.2 3453.86,2653.56 3453.86,2604.86 3475.95,2582.77 D1L.2@3563.86,2582.77
  Bottom Layer w5: v1(2270.91,1441.1) 2286.1,1441.1 2360,1515 2613.99,1515 2626.78,1502.21 2965.5,1502.21 3090,1626.72 3090,2540.86 3109.14,2560 3447.72,2560 v1(3475,2587.28)
NetD1M_1: D1M.1 R9M.2 | length 62
  Top Layer w25: D1M.1 R9M.2
NetD1M_2: D1M.2 R10M.2 U1.13 | length 1811.1
  Top Layer w5: 1777.78,2691.97 1809.94,2691.97 1812.87,2694.9 1812.87,2699.04 1789.64,2722.26 ; 1782.5,2695 1812.87,2695 1818.87,2695 2065.86,2695 2105,2655.86 2105,2020 2145,1980 2145,1515 2163.39,1496.61 2203.91,1496.61 U1.13@2204.09,1496.42
  Top Layer w27: D1M.2 1767.56,2700.18 1789.64,2722.26 1789.64,2770.97 R10M.2
NetD1N_1: D1N.1 R9N.2 | length 62
  Top Layer w25: D1N.1@3563.86,2917.42 R9N.2
NetD1N_2: D1N.2 R10N.2 U1.11 | length 2641.5
  Top Layer w5: U1.11 2234.84,1536.89 2235.18,1537.23 2258.1,1537.23 2276.53,1518.79 v1(2278.6,1518.79)
  Top Layer w27: R10N.2 3453.86,2921.28 3453.86,2872.57 3475.95,2850.49 D1N.2@3563.86,2850.49
  Bottom Layer w5: v1(2278.6,1518.79) 2294.8,1535 2622.28,1535 2635.07,1522.21 2956.36,1522.21 2958.07,1523.93 2958.93,1523.93 3070,1635 3070,2700 3077.07,2707.07 3077.07,2707.93 3189.57,2820.43 3307.07,2820.43 3307.5,2820 3440,2820 v1(3475,2855)
NetJ1_1: J1.1 R2.2 | length 827.5
  Top Layer w30: R2.2 3702.47,1112.47 3850,1260 J1.1
NetJ1_2: J1.2 R9B.1 R10B.1 R11B.2 | length 855
  Top Layer w27: R10B.1 3456.11,1423.1 3565.21,1423.1 R9B.1 3628.38,1423.38 3745,1540 3745,1790 3795,1840 J1.2
  Top Layer w40: R11B.2 3328.64,1415.82 3330.29,1417.47 R10B.1
NetJ1_3: J1.3 R9D.1 R10D.1 R11D.2 | length 706.5
  Top Layer w27: R10D.1 3456.34,1690.05 3565.43,1690.05 R9D.1 3620.33,1690.33 3665,1735 3665,1850 3755,1940 J1.3
  Top Layer w40: R11D.2 3328.86,1682.77 3330.52,1684.42 R10D.1
NetJ1_4: J1.4 R9F.1 R10F.1 R11F.2 | length 571.1
  Top Layer w27: R10F.1 3454.49,1960.48 3563.58,1960.48 R9F.1 3564.14,1960.48 3576.55,1960.48 3577.03,1960 3635,1960 3715,2040 J1.4
  Top Layer w40: R11F.2 3327.01,1953.2 3328.67,1954.86 R10F.1
NetJ1_5: J1.5 R9H.1 R10H.1 R11H.2 | length 577.8
  Top Layer w27: R10H.1 3454.49,2230.48 3563.58,2230.48 R9H.1 3619.24,2230.76 3713.07,2136.93 3846.93,2136.93 J1.5
  Top Layer w40: R11H.2 3327.01,2223.2 3328.67,2224.86 R10H.1
NetJ1_6: J1.6 R9J.1 R10J.1 R11J.2 | length 718.9
  Top Layer w27: R10J.1 3454.49,2500.48 3563.58,2500.48 R9J.1 3564.14,2500.48 3624.52,2500.48 3665,2460 3665,2335 3760,2240 J1.6
  Top Layer w40: R11J.2 3327.01,2493.2 3328.67,2494.86 R10J.1
NetJ1_7: J1.7 R9L.1 R10L.1 R11L.2 | length 853.7
  Top Layer w27: R10L.1 3454.49,2770.48 3563.58,2770.48 R9L.1 3634.24,2770.76 3745,2660 3745,2425 3823.87,2346.13 3843.87,2346.13 J1.7
  Top Layer w40: R11L.2 3327.01,2763.2 3328.67,2764.86 R10L.1
NetJ1_8: J1.8 R1.1 R9N.1 R10N.1 R11N.2 | length 1288.7
  Top Layer w27: R1.1 3105.12,3029.64 3105.12,3064.18 3120.93,3080 3303.04,3080 3318.86,3064.18 3318.86,3039.39 3322.51,3035.73 R11N.2@3328.62,3035.73 ; R10N.1 3454.49,3038.2 3563.58,3038.2 R9N.1 3636.52,3038.48 3845,2830 3845,2465 J1.8@3850,2460
  Top Layer w40: R11N.2 3327.01,3030.92 3328.67,3032.57 R10N.1
NetJ2_1: J2.1 R9A.1 R10A.1 R11A.2 | length 951.9
  Top Layer w27: J2.1 1388.42,1786.58 1439.21,1786.58 1470,1755.79 1470,1425 1616.83,1278.17 R9A.1 1679.92,1277.89 1789.02,1277.89 R10A.1
  Top Layer w40: R10A.1 1914.84,1272.26 1916.49,1270.61 R11A.2
NetJ2_2: J2.2 R9C.1 R10C.1 R11C.2 | length 792.6
  Top Layer w27: J2.2 1455,1890 1520,1825 1520,1645 1615.53,1549.47 R9C.1 1679.92,1549.19 1789.02,1549.19 R10C.1
  Top Layer w40: R10C.1 1914.84,1543.56 1916.49,1541.91 R11C.2
NetJ2_3: J2.3 R9E.1 R10E.1 R11E.2 | length 663.6
  Top Layer w27: J2.3 1520,1990 1565,1945 1565,1865 1610.53,1819.47 R9E.1 1679.92,1819.19 1789.02,1819.19 R10E.1
  Top Layer w40: R10E.1 1914.84,1813.56 1916.49,1811.91 R11E.2
NetJ2_4: J2.4 R9G.1 R10G.1 R11G.2 | length 546.3
  Top Layer w27: J2.4 1385.53,2089.47 R9G.1 1679.92,2089.19 1789.02,2089.19 R10G.1
  Top Layer w40: R10G.1 1914.84,2083.56 1916.49,2081.91 R11G.2
NetJ2_5: J2.5 R9I.1 R10I.1 R11I.2 | length 645.4
  Top Layer w27: J2.5 1390.1,2195.1 1520.1,2195.1 1595,2270 1595,2325 1625,2355 1664.07,2355 1665.11,2356.04 1677.51,2356.04 R9I.1 1678.07,2356.04 1787.17,2356.04 R10I.1
  Top Layer w40: R10I.1 1912.99,2350.41 1914.64,2348.76 R11I.2
NetJ2_6: J2.6 R9K.1 R10K.1 R11K.2 | length 793
  Top Layer w27: J2.6 1470,2290 1535,2355 1535,2540 1619.47,2624.47 R9K.1 1679.92,2624.19 1789.02,2624.19 R10K.1
  Top Layer w40: R10K.1 1914.84,2618.56 1916.49,2616.91 R11K.2
NetJ2_7: J2.7 R9M.1 R10M.1 R11M.2 | length 935.9
  Top Layer w27: J2.7 1391.13,2396.13 1436.13,2396.13 1470,2430 1470,2743.17 1615,2888.17 R9M.1 1679.92,2887.89 1789.02,2887.89 R10M.1
  Top Layer w40: R10M.1 1914.84,2882.26 1916.49,2880.61 R11M.2
NetJ3_2: J3.2 U1.56 | length 943.4
  Top Layer w5: U1.56@2440.61,1811.68 2440.61,1845.61 2485,1890 2518.94,1890 2543.94,1915 2620,1915 2650,1945 2755,1945 2810,2000 2810,2230 2830,2250 2992.71,2250 3005,2237.71 J3.2
NetJ4_6: J4.6 R4.1 U1.39 | length 1164
  Top Layer w5: J4.6 2330,1190 2355,1215 2612.43,1215 2735,1337.57 2735,1494.14 2706.52,1522.62 v1@2706.52,1551.52 ; U1.39 2703.48,1556.57 2706.81,1553.25 2707.98,1552.08 v1(2707.98,1551.36)
  Bottom Layer w5: v1@2710.11,1552.43 2952.43,1552.43 3020,1620 R4.1
NetJ4_7: J4.7 RN1.1 U1.40 | length 1024.8
  Top Layer w5: J4.7 J4.7@2430,1160 ; J4.7@2432.03,1162.03 J4.7@2430,1160 ; U1.40 v1@2734.62,1576.26 ; v1@2737.3,1575.37 2737.3,1505.99 2745,1498.28 2745,1333.43 2616.57,1205 2445,1205 2430,1190 2430,1162.03 J4.7@2430,1160 ; v1@2734.62,1576.26 2738.04,1576.26 v1@2734.62,1576.26
  Bottom Layer w5: v1@2737.3,1575.37 2738.9,1573.77 2758.43,1573.77 2758.47,1573.72 2774.47,1573.72 2774.51,1573.77 2928.77,1573.77 2952.24,1597.24 RN1.1
  other v1: 2734.5,1573.25
NetJ4_8: J4.8 RN1.2 U1.41 | length 901.6
  Top Layer w5: J4.8 2530,1190 2535,1195 2620.71,1195 2755,1329.29 2755,1499.9 2768.08,1512.98 v1@2768.08,1593.08 ; U1.41 2762.73,1595.94 2765.64,1593.04 2765.73,1593.12 v1(2765.73,1593.82)
  Bottom Layer w5: v1@2768.08,1593.08 2903.08,1593.08 2920,1610 2920,1643.82 RN1.2
NetJ4_9: J4.9 RN1.3 U1.42 | length 797.8
  Top Layer w5: J4.9 2629.85,1145.15 2630,1145.29 2630,1190.15 2765,1325.15 2765,1495.76 2791.25,1522.01 2791.25,1598 2791.1,1598.15 v1@2791.1,1617.61 ; U1.42 2660.69,1619.51 v1@2786.72,1619.51
  Bottom Layer w5: v1@2791.1,1617.61 2793.7,1615 2815.51,1615 2816.04,1614.47 2832.04,1614.47 2832.57,1615 2885,1615 2889.25,1619.25 RN1.3
  other v1: 2792.06,1617.46
NetJ4_10: J4.10 RN1.4 U1.43 | length 732.4
  Top Layer w5: U1.43 2658.61,1637.12 2820.4,1637.12 2823,1634.52 2823.74,1633.78 v1(2824.04,1633.78) ; J4.10 2729.5,1145.5 2729.5,1275.5 2775,1321.01 2775,1491.62 2825,1541.62 v1@2825,1631.37
  Bottom Layer w5: v1@2825,1635 2848.44,1635 2857.76,1644.31 RN1.4
NetJ5_1: J5.1 T1.6 | length 261.6
  Top Layer w12: T1.6 2670,2790 2700,2820 2700,2928.43 J5.1@2698.43,2930
NetJ5_2: J5.2 T1.7 | length 261
  Top Layer w12: T1.7 2570,2790 2600,2820 J5.2@2600,2930
NetJ6_1: J6.1 T1.9 | length 256.8
  Top Layer w12: J6.1@2350,2930 2350,2815 2370,2795 T1.9
NetJ6_2: J6.2 T1.10 | length 257.5
  Top Layer w12: J6.2@2251.57,2930 2250,2928.43 2250,2810 2270,2790 T1.10
NetQ1_1: Q1.1 U1.49 | length 331.3
  Top Layer w5: U1.49 2580,1813.46 2580,1820 2667.11,1907.11 2865.33,1907.11 Q1.1
NetR5_1: R5.1 R6.2 U1.58 | length 309
  Top Layer w5.1: U1.58 2401.38,1841.38 2425,1865 2425,1875 2425.05,1875.05 2425.12,1875.12 v1(2425.12,1891.64)
  Top Layer w12: U1.58@2401.28,1811.91 U1.58
  Bottom Layer w5.1: R5.1 2420,1799.53 2425.05,1804.57 2425.12,1804.65 v1(2425.12,1891.64)
  Bottom Layer w27: R6.2 R5.1
NetR5_2: R5.2 U1.57 | length 329
  Top Layer w5.1: U1.57 2421.06,1842.68 2460,1881.62 2461.04,1882.66 v1(2461.04,1923.57)
  Top Layer w12: U1.57@2420.97,1811.91 U1.57
  Bottom Layer w5.1: R5.2 2460,1780.47 2461.04,1781.52 v1(2461.04,1923.57)
NetR7_1: R7.1 T1.2 U1.63 | length 339
  Top Layer w10: R7.1@2301.86,2012.33 2301.86,2036.86 2357.2,2092.2 T1.2@2357.2,2125.74 ; U1.63 U1.63@2302.95,1834.95
  Top Layer w12: R7.1@2301.86,2012.33 R7.1 2299.53,1846.25 2300.27,1845.51 2300.27,1837.63 U1.63@2302.95,1834.95
NetR7_2: R7.2 T1.1 U1.64 | length 340.5
  Top Layer w12: T1.1@2270,2126.34 2245,2101.34 2245,2010 2245,1875 2283.27,1836.73 U1.64
NetR8_1: R8.1 T1.4 U1.62 | length 507
  Top Layer w12: U1.62 2322.54,1812.1 2322.54,1838.69 2322.38,1838.85 2322.38,1872.38 2322.38,1924.3 2322.38,1966.91 R8.1 2368.69,2013.21 2368.69,2038.69 2386,2056 2539.59,2056 2570,2086.41 T1.4@2570,2126.34
NetR8_2: R8.2 T1.5 U1.61 | length 565.2
  Top Layer w12: U1.61 2342.42,1812.1 2342.42,1922.42 2424.53,2004.53 R8.2 2432.31,2017.78 2432.31,2032.31 2439,2039 2546.63,2039 2582.63,2075 2652.19,2075 2669.39,2092.2 T1.5@2669.39,2137.93
VCC: Q1.3 R1.2 U1.1 | length 2064.2
  Top Layer w5: U1.1 2261.26,1733.74 2285,1710 2595,1710 2610,1725 2610,1755 2620,1765 ; Q1.3 Q1.3@3047.36,1870
  Top Layer w12: 2620,1765 2622.34,1767.34 2645,1790 2913.46,1790 2993.46,1870 Q1.3
  Top Layer w27: Q1.3@3047.36,1870 3052.36,1870 3105,1922.64 3105,2969.05 3105.28,2969.33 R1.2@3107.24,2969.33
pads on no net: T1.3 T1.8 U1.3 U1.5 U1.7 U1.9 U1.44 U1.45 U1.46 U1.47 U1.53 U1.54

## Polygon pours and split planes (outlines as drawn)
GND on Top Layer "GND_L01_P012" (solid, remove dead copper, pour order 12): 2138.8,3148.46 2138.8,2044.98 2141.44,2038.61 2190,1990.05 2220,1830 2340.66,1830 2355.92,1890.41 2363.57,1920.68 2448.29,1920.68 2448.29,1932.74 2451.53,1935.98 2637.8,1935.98 2644.16,1938.61 2764.16,2058.61 2766.8,2064.98 2766.8,3148.45 4049.76,3148.45 4049.76,983.45 1238.83,983.45 1240.68,3148.46
no net on Top Layer "NONET_L01_P008" (solid, shelved, pour order 8): 2272.5,1780
no net on Top Layer "NONET_L01_P007" (solid, shelved, pour order 7): 4030,945
no net on Top Layer "NONET_L01_P006" (solid, shelved, pour order 6): 4020,935
GND on Bottom Layer "GND_L02_P011" (solid, remove dead copper, pour order 11): 2137.12,3143.22 2137.12,2039.75 2139.75,2033.38 2186.82,1986.32 2223.06,1832.27 2340.87,1832.27 2354.24,1885.18 2361.89,1915.45 2446.61,1915.45 2446.61,1927.51 2449.84,1930.75 2636.12,1930.75 2642.48,1933.38 2762.48,2053.38 2765.12,2059.75 2765.12,3143.22 4048.07,3143.22 4048.07,978.22 1237.15,978.22 1239,3143.23

## Other copper
Top Layer:
  region: 3125.49,1233.68 3126.06,1233.68 3126.06,1233.11 3126.63,1233.11 3126.63,1232.54 3126.06,1232.54 3126.06,1233.11 3125.49,1233.11 3125.49,1233.68 3124.92,1233.68 3124.92,1234.25 3125.49,1234.25
  region: 2985.17,1240.53 2985.74,1240.53 2985.74,1239.96 2986.31,1239.96 2986.31,1239.39 2985.74,1239.39 2985.74,1239.96 2985.17,1239.96 2985.17,1240.53 2984.6,1240.53 2984.6,1241.1 2985.17,1241.1
  region: 3060.47,1208.58 3061.04,1208.58 3061.04,1208.01 3061.61,1208.01 3061.61,1207.44 3061.04,1207.44 3061.04,1208.01 3060.47,1208.01 3060.47,1208.58 3059.89,1208.58 3059.89,1209.16 3060.47,1209.16
  region: 3005.7,1247.37 3006.27,1247.37 3006.27,1246.8 3006.85,1246.8 3006.85,1246.23 3006.27,1246.23 3006.27,1246.8 3005.7,1246.8 3005.7,1247.37 3005.13,1247.37 3005.13,1247.94 3005.7,1247.94
  region: 3142.61,1229.12 3143.18,1229.12 3143.18,1228.55 3143.75,1228.55 3143.75,1227.98 3143.18,1227.98 3143.18,1228.55 3142.61,1228.55 3142.61,1229.12 3142.04,1229.12 3142.04,1229.69 3142.61,1229.69
  region: 3128.92,1162.95 3129.49,1162.95 3129.49,1162.38 3130.06,1162.38 3130.06,1161.81 3129.49,1161.81 3129.49,1162.38 3128.92,1162.38 3128.92,1162.95 3128.35,1162.95 3128.35,1163.52 3128.92,1163.52
  region: 2985.17,1092.22 2985.74,1092.22 2985.74,1091.65 2986.31,1091.65 2986.31,1091.08 2985.74,1091.08 2985.74,1091.65 2985.17,1091.65 2985.17,1092.22 2984.6,1092.22 2984.6,1092.79 2985.17,1092.79
  region: 3049.06,1222.28 3049.63,1222.28 3049.63,1221.7 3050.2,1221.7 3050.2,1221.13 3050.77,1221.13 3050.77,1220.56 3051.34,1220.56 3051.34,1219.99 3050.77,1219.99 3050.77,1220.56 3050.2,1220.56 3050.2,1221.13 3049.63,1221.13 3049.63,1221.7 3049.06,1221.7 3049.06,1222.28 3048.49,1222.28 3048.49,1222.85 3049.06,1222.85
  region: 3038.79,1138.99 3039.36,1138.99 3039.36,1138.42 3039.93,1138.42 3039.93,1137.85 3039.36,1137.85 3039.36,1138.42 3038.79,1138.42 3038.79,1138.99 3038.22,1138.99 3038.22,1139.56 3038.79,1139.56
  region: 3035.37,1142.42 3035.94,1142.42 3035.94,1141.85 3036.51,1141.85 3036.51,1141.27 3035.94,1141.27 3035.94,1141.85 3035.37,1141.85 3035.37,1142.42 3034.8,1142.42 3034.8,1142.99 3035.37,1142.99
  region: 3125.49,1166.37 3126.06,1166.37 3126.06,1165.8 3126.63,1165.8 3126.63,1165.23 3126.06,1165.23 3126.06,1165.8 3125.49,1165.8 3125.49,1166.37 3124.92,1166.37 3124.92,1166.94 3125.49,1166.94
  region: 3057.04,1069.4 3057.61,1069.4 3057.61,1068.83 3058.18,1068.83 3058.18,1068.26 3057.61,1068.26 3057.61,1068.83 3057.04,1068.83 3057.04,1069.4 3056.47,1069.4 3056.47,1069.97 3057.04,1069.97
  region: 2978.32,1107.05 2978.89,1107.05 2978.89,1106.48 2979.46,1106.48 2979.46,1105.91 2978.89,1105.91 2978.89,1106.48 2978.32,1106.48 2978.32,1107.05 2977.75,1107.05 2977.75,1107.62 2978.32,1107.62
  region: 3090.13,1201.74 3090.7,1201.74 3090.7,1201.17 3091.27,1201.17 3091.27,1200.6 3090.7,1200.6 3090.7,1201.17 3090.13,1201.17 3090.13,1201.74 3089.56,1201.74 3089.56,1202.31 3090.13,1202.31
  region: 3050.2,1153.82 3050.77,1153.82 3050.77,1153.25 3051.34,1153.25 3051.34,1152.68 3050.77,1152.68 3050.77,1153.25 3050.2,1153.25 3050.2,1153.82 3049.63,1153.82 3049.63,1154.39 3050.2,1154.39
  region: 3053.62,1076.25 3054.19,1076.25 3054.19,1075.68 3054.76,1075.68 3054.76,1075.11 3054.19,1075.11 3054.19,1075.68 3053.62,1075.68 3053.62,1076.25 3053.05,1076.25 3053.05,1076.82 3053.62,1076.82
  region: 3050.2,1079.67 3050.77,1079.67 3050.77,1079.1 3051.34,1079.1 3051.34,1078.53 3050.77,1078.53 3050.77,1079.1 3050.2,1079.1 3050.2,1079.67 3049.63,1079.67 3049.63,1080.24 3050.2,1080.24
  region: 3050.2,1029.47 3050.77,1029.47 3050.77,1028.9 3051.34,1028.9 3051.34,1028.33 3050.77,1028.33 3050.77,1028.9 3050.2,1028.9 3050.2,1029.47 3049.63,1029.47 3049.63,1030.04 3050.2,1030.04
  region: 3122.07,1169.8 3122.64,1169.8 3122.64,1169.23 3123.21,1169.23 3123.21,1168.66 3122.64,1168.66 3122.64,1169.23 3122.07,1169.23 3122.07,1169.8 3121.5,1169.8 3121.5,1170.37 3122.07,1170.37
  region: 2988.59,1088.8 2989.16,1088.8 2989.16,1088.23 2989.73,1088.23 2989.73,1087.65 2989.16,1087.65 2989.16,1088.23 2988.59,1088.23 2988.59,1088.8 2988.02,1088.8 2988.02,1089.37 2988.59,1089.37
  region: 3063.89,1201.74 3064.46,1201.74 3064.46,1201.17 3063.89,1201.17 3063.89,1201.74 3063.32,1201.74 3063.32,1202.31 3063.89,1202.31
  region: 3096.97,1183.49 3097.54,1183.49 3097.54,1182.92 3098.11,1182.92 3098.11,1182.35 3097.54,1182.35 3097.54,1182.92 3096.97,1182.92 3096.97,1183.49 3096.4,1183.49 3096.4,1184.06 3096.97,1184.06
  region: 3146.03,1216.57 3146.6,1216.57 3146.6,1216 3147.17,1216 3147.17,1215.43 3146.6,1215.43 3146.6,1216 3146.03,1216 3146.03,1216.57 3145.46,1216.57 3145.46,1217.14 3146.03,1217.14
  region: 3103.82,1169.8 3104.39,1169.8 3104.39,1169.23 3104.96,1169.23 3104.96,1168.66 3104.39,1168.66 3104.39,1169.23 3103.82,1169.23 3103.82,1169.8 3103.25,1169.8 3103.25,1170.37 3103.82,1170.37

## Silkscreen, mask and mechanical layers (free items; w line width, h text height)
Top Overlay:
  drawing of 19 lines, arcs and shapes, not listed
  text "isoSPI A" at 2160,3030 h32
  text "isoSPI B" at 2520,3030 h32
  text "BT14" at 3905,2415 h32
  text "LTC6813 Based BMS  / Slave Device Rev 1.5 / Waterloop 2020" at 3035,2410 h35 r90
  text "BT13" at 1200,2370 h32
  text "BT12" at 3905,2310 h32
  text "GND" at 2850,2275 h32 r90
  text "BT11" at 1210,2265 h32
  text "GND" at 3110,2255 h32 r90
  text "BT10" at 3905,2215 h32
  text "BT9" at 1225,2165 h32
  text "WDT" at 3110,2145 h32 r90
  text "DTEN" at 2850,2130 h32 r90
  text "BT8" at 3905,2110 h32
  text "BT7" at 1225,2065 h32
  text "VDD" at 3110,2035 h32 r90
  text "VDD" at 2850,2020 h32 r90
  text "BT6" at 3905,2005 h32
  text "BT5" at 1225,1965 h32
  text "BT4" at 3905,1910 h32
  text "BT3" at 1225,1865 h32
  text "BT2" at 3905,1805 h32
  text "BT1" at 1235,1765 h32
  text "BT0" at 3905,1715 h32
  text "CELLS SENSE" at 1285,1620 h32
  text "CELLS SENSE" at 3765,1575 h32
  text "TEMP SENSE" at 2275,1010 h32 r90
  text "Designed by: Chawthri K." at 1260,990 h35
  text "Project Mewtwo" at 2805,983.33 h40
Outline:
  the board outline again, w5